# Altium PCB Rx_Universal_MFB_PCB.PcbDoc
Units mm, origin at the board's own origin, x right, y up, seen from the top; angles counter-clockwise.
Board outline 137 x 63 mm, 2 copper layers (Top Layer, Bottom Layer); 78 components, 29 nets, 176 pads, 5 vias.
Unrouted connection lines stored in the file: 50.
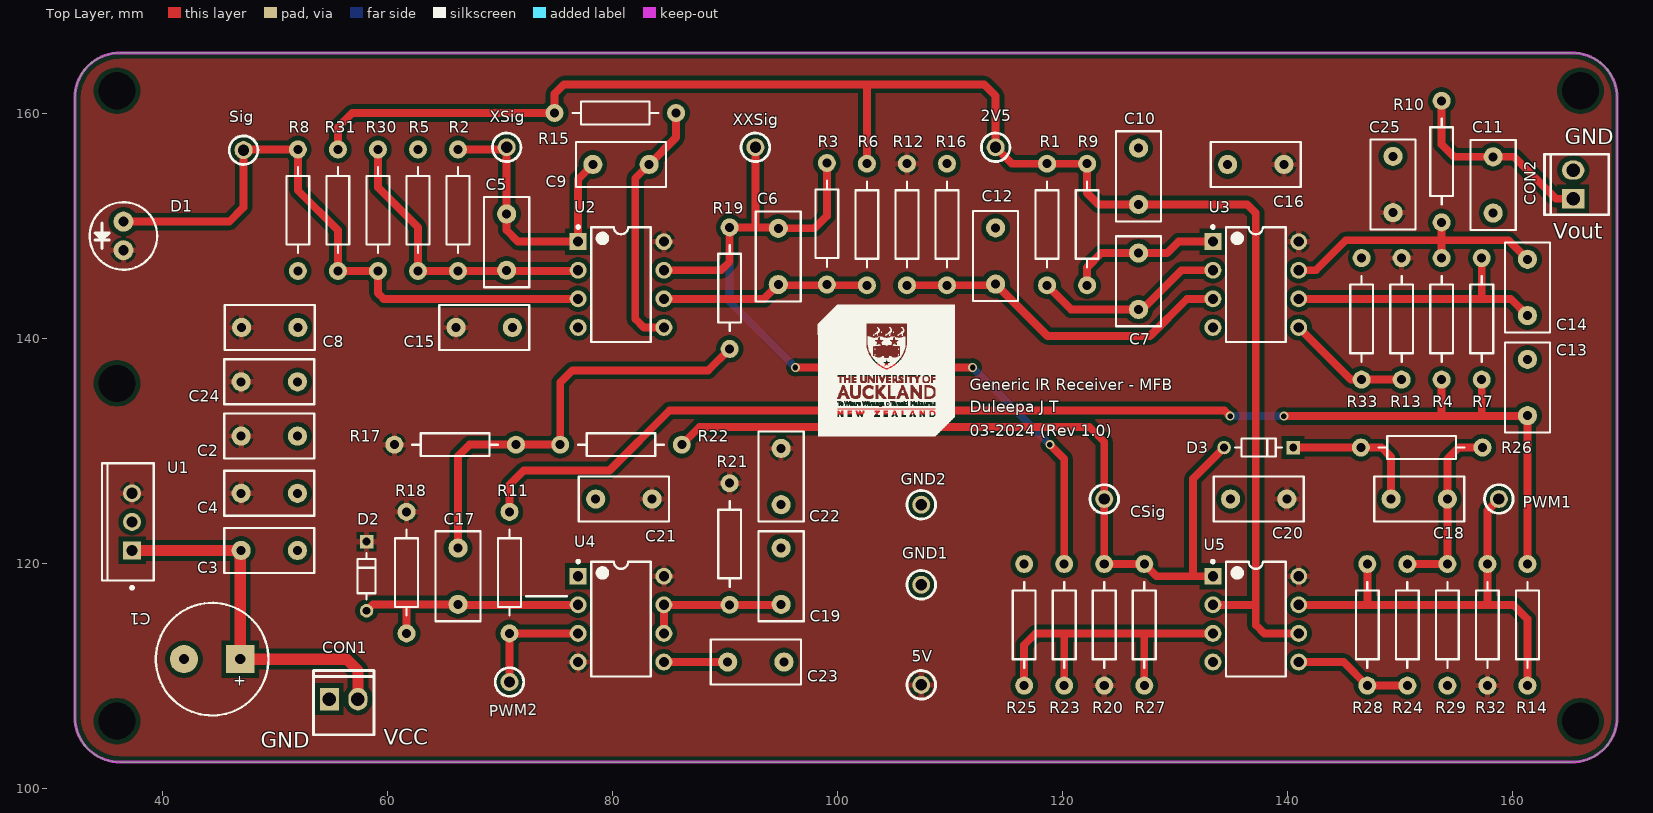
[diagram p0: Top Layer view]
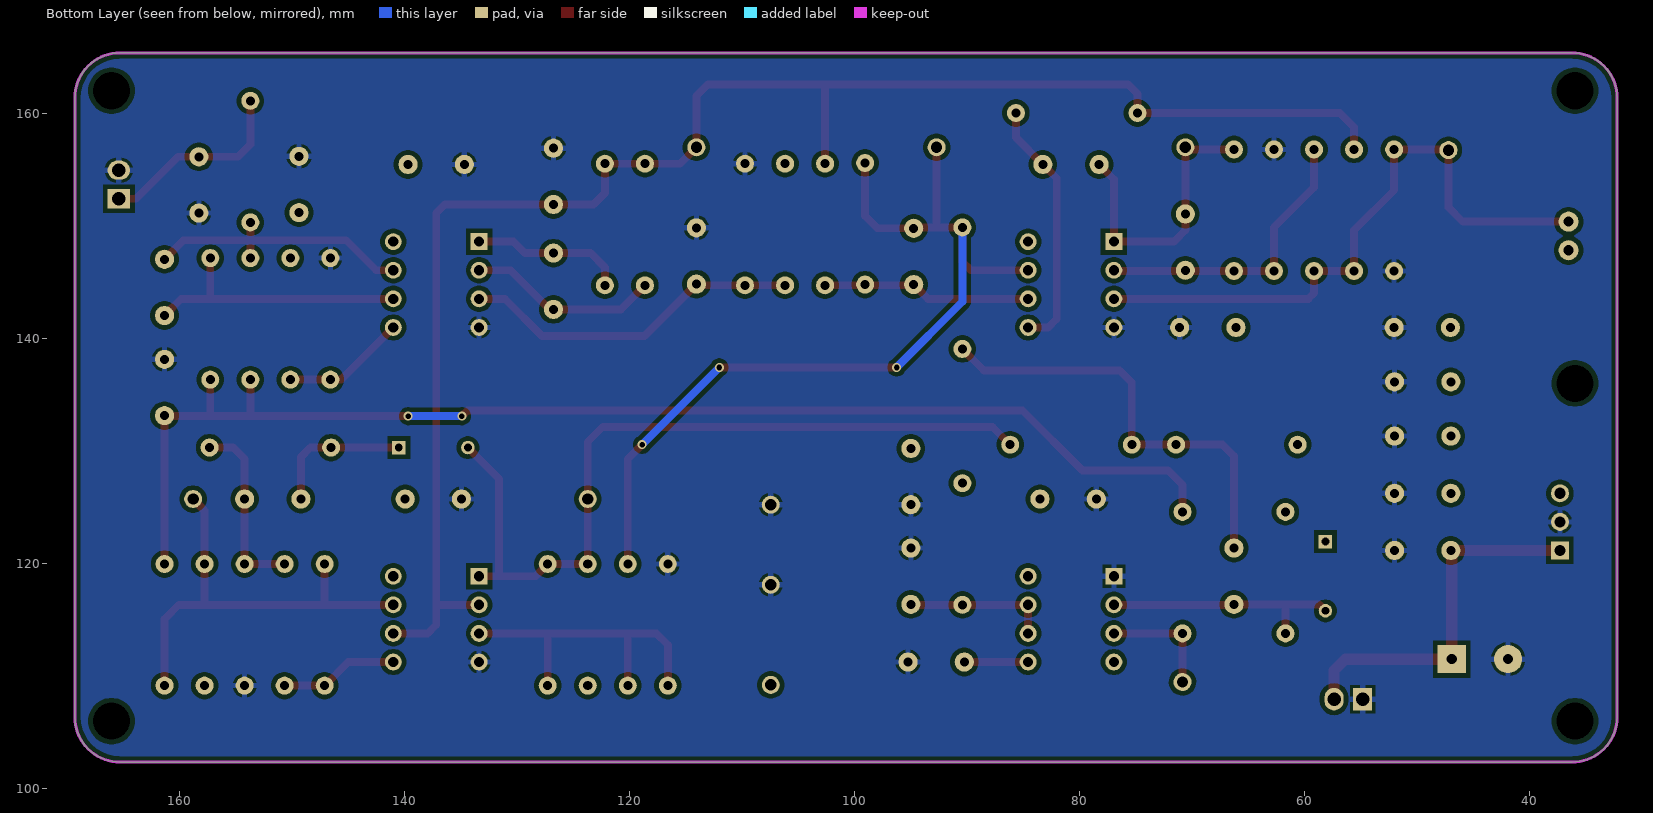
[diagram p1: Bottom Layer view, seen from below]
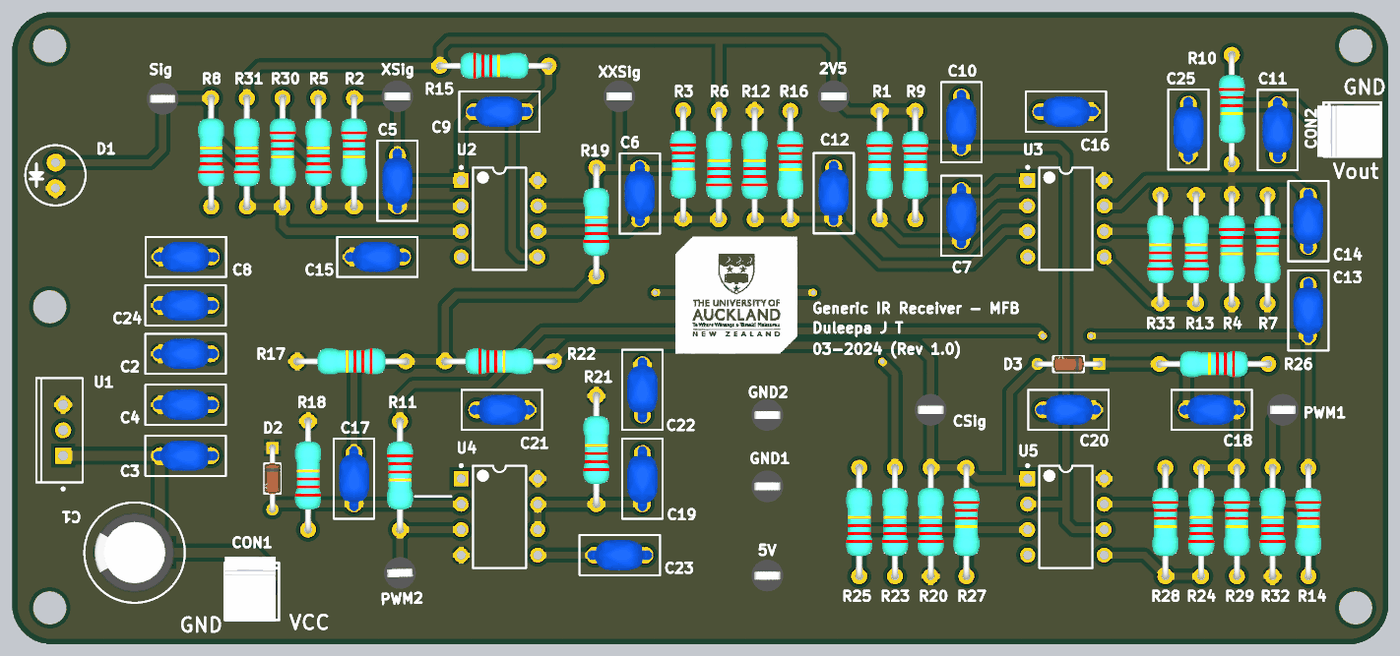
[diagram p2: 3D render of the assembled board from above, using the file's embedded part models]

## Layer stack, top to bottom
Top Solder: solder mask 0.0102, Solder Resist, Dk 3.5
Top Layer: signal copper 0.0356
Dielectric 1: dielectric 0.32, FR-4, Dk 4.8
Bottom Layer: signal copper 0.0356
Bottom Solder: solder mask 0.0102, Solder Resist, Dk 3.5

## Board outline
32.258,106.362 32.258,161.362 cw(c36.258,161.362) 36.258,165.362 165.258,165.362 cw(c165.258,161.362) 169.258,161.362 169.258,106.362 cw(c165.258,106.362) 165.258,102.362 36.258,102.362 cw(c36.258,106.362)

## Design rules (kind name [scope] priority, off if disabled: settings)
BoardOutlineClearance [All] p1: gap=0.3 ignorepadtopadclearanceinfootprint=FALSE except(0.4: Arc-SplitBarrior Arc-SplitContinuation Track-SplitBarrior Track-SplitContinuation SMDPad-SplitBarrior SMDPad-SplitContinuation THPad-SplitBarrior THPad-SplitContinuation Via-SplitBarrior Via-SplitContinuation Fill-SplitBarrior Fill-SplitContinuation Poly-SplitBarrior Poly-SplitContinuation Region-SplitBarrior Region-SplitContinuation Text-SplitBarrior Text-SplitContinuation)
Clearance [All] p1: gap=0.4 ignorepadtopadclearanceinfootprint=TRUE
Height [All] p1: minheight=0 maxheight=50 prefheight=12.7
HoleSize [All] p1: absolutevalues=TRUE maxlimit=12 minlimit=0.25 maxpercent=80.000 minpercent=20.000
MinimumAnnularRing [All] p1: minimumring=0.13
MinimumSolderMaskSliver [All] p1: minsoldermaskwidth=0.1
PolygonConnect PolygonConnect_1 [All] p1: thpad.connectstyle=Relief thpad.reliefconductorwidth=0.508 thpad.reliefentries=4 thpad.polygonreliefangle="90 Angle" thpad.airgapwidth=0.254 smdpad.connectstyle=Relief smdpad.reliefconductorwidth=0.508 smdpad.reliefentries=4 smdpad.polygonreliefangle="90 Angle" smdpad.airgapwidth=0.254 via.connectstyle=Direct via.reliefconductorwidth=0.508 via.reliefentries=4 via.polygonreliefangle="90 Angle" via.airgapwidth=0.254
RoutingCorners [All] p1: cornerstyle=Round minsetback=2.54 maxsetback=2.54
RoutingVias [All] p1: holewidth=0.4 width=0.65 viastyle="Through Hole" minholewidth=0.25 minwidth=0.4 maxholewidth=1 maxwidth=2
SilkToSilkClearance [All] p1: silktosilkclearance=0.1
SilkToSolderMaskClearance [IsPad] p1: minsilkscreentomaskgap=0.1 clearancetoexposedcopper=TRUE
SolderMaskExpansion [All] p1: expansion=0.102 istentingtop=FALSE
SupplyNets "Schematic Supply Nets" [InNet('Vof')] p1: voltage=0.000
SupplyNets "Schematic Supply Nets_20" [InNet('XXSig')] p2: voltage=0.000
SupplyNets "Schematic Supply Nets_19" [InNet('2V5')] p3: voltage=0.000
SupplyNets "Schematic Supply Nets_18" [InNet('PWM_555')] p4: voltage=0.000
SupplyNets "Schematic Supply Nets_17" [InNet('Sig')] p5: voltage=0.000
SupplyNets "Schematic Supply Nets_16" [InNet('XSig')] p6: voltage=0.000
SupplyNets "Schematic Supply Nets_15" [InNet('CSig')] p7: voltage=0.000
SupplyNets "Schematic Supply Nets_14" [InNet('PWM_Op')] p8: voltage=0.000
SupplyNets "Schematic Supply Nets_13" [InNet('Vfilt')] p9: voltage=0.000
SupplyNets "Schematic Supply Nets_9" [InNet('GND')] p10: voltage=0.000
SupplyNets "Schematic Supply Nets_8" [InNet('VCC')] p11: voltage=0.000
SupplyNets "Schematic Supply Nets_6" [InNet('5V')] p12: voltage=0.000
SupplyNets "Schematic Supply Nets_3" [InNet('CNT')] p13: voltage=0.000
SupplyNets "Schematic Supply Nets_1" [InNet('Vrc')] p14: voltage=0.000
Width [All] p1: maxlimit=10.16 minlimit=0.127 preferedwidth=0.508
24 further rules are at their usual default settings.

## Components (designator, comment, footprint, x,y, rotation, side; value= is the part's Value field where it differs from the comment)
2V5 "TP TH" TP_TH_2.5mm 114.046,156.972 r0 top
5V "TP TH" TP_TH_2.5mm 107.442,109.22 r0 top
C1 "ECAP" CR05 44.45,111.506 r180 top
C2 "CCAP_TH_5P0" CCAP_5P0 49.53,131.318 r180 top
C3 "CCAP_TH_5P0" CCAP_5P0 49.53,121.158 r180 top
C4 "CCAP_TH_5P0" CCAP_5P0 49.53,126.238 r180 top
C5 "CCAP_TH_5P0" CCAP_5P0 70.612,148.55 r270 top
C6 "CCAP_TH_5P0" CCAP_5P0 94.742,147.28 r270 top
C7 "CCAP_TH_5P0" CCAP_5P0 126.746,145.074 r270 top
C8 "CCAP_TH_5P0" CCAP_5P0 49.57,140.97 r180 top
C9 "CCAP_TH_5P0" CCAP_5P0 80.772,155.448 r180 top
C10 "CCAP_TH_5P0" CCAP_5P0 126.746,154.392 r90 top
C11 "CCAP_TH_5P0" CCAP_5P0 158.242,153.63 r90 top
C12 "CCAP_TH_5P0" CCAP_5P0 114.046,147.32 r90 top
C13 "CCAP_TH_5P0" CCAP_5P0 161.29,135.636 r270 top
C14 "CCAP_TH_5P0" CCAP_5P0 161.29,144.526 r90 top
C15 "CCAP_TH_5P0" CCAP_5P0 68.62,140.97 r180 top
C16 "CCAP_TH_5P0" CCAP_5P0 137.16,155.448 r0 top
C17 "CCAP_TH_5P0" CCAP_5P0 66.294,118.872 r90 top
C18 "CCAP_TH_5P0" CCAP_5P0 151.678,125.73 r180 top
C19 "CCAP_TH_5P0" CCAP_5P0 94.996,118.872 r270 top
C20 "CCAP_TH_5P0" CCAP_5P0 137.414,125.73 r0 top
C21 "CCAP_TH_5P0" CCAP_5P0 81.026,125.73 r0 top
C22 "CCAP_TH_5P0" CCAP_5P0 94.996,127.722 r90 top
C23 "CCAP_TH_5P0" CCAP_5P0 92.75,111.252 r180 top
C24 "CCAP_TH_5P0" CCAP_5P0 49.53,136.144 r180 top
C25 "CCAP_TH_5P0" CCAP_5P0 149.352,153.67 r270 top
CON1 "HDR2X1" HDR2X1_2P54 54.864,107.95 r90 top
CON2 "HDR2X1" HDR2X1_2P54 165.354,152.4 r180 top
CSig "TP TH" TP_TH_2.5mm 123.698,125.73 r0 top
D1 "PhotoD_TH" TH_LED 36.576,149.098 r270 top
D2 "BAT85,113" FP-SOD68-MFG 58.166,118.872 r270 top
D3 "BAT85,113" FP-SOD68-MFG 137.414,130.302 r180 top
GND1 "TP TH" TP_TH_2.5mm 107.442,118.11 r0 top
GND2 "TP TH" TP_TH_2.5mm 107.442,125.222 r0 top
PWM1 "TP TH" TP_TH_2.5mm 158.75,125.73 r0 top
PWM2 "TP TH" TP_TH_2.5mm 70.866,109.474 r2 top
R1 "RESAX4" RAX4 118.618,150.114 r270 top
R2 "RESAX4" RAX4 66.294,151.384 r270 top
R3 "RESAX4" RAX4 99.06,150.18 r270 top
R4 "RESAX4" RAX4 153.67,141.732 r270 top
R5 "RESAX4" RAX4 62.738,151.384 r90 top
R6 "RESAX4" RAX4 102.616,150.114 r90 top
R7 "RESAX4" RAX4 157.226,141.732 r270 top
R8 "RESAX4" RAX4 52.07,151.384 r90 top
R9 "RESAX4" RAX4 122.174,150.114 r270 top
R10 "RESAX4" RAX4 153.67,155.702 r270 top
R11 "RESAX4" RAX4 70.866,119.192 r270 top
R12 "RESAX4" RAX4 106.172,150.114 r90 top
R13 "RESAX4" RAX4 150.114,141.732 r90 top
R14 "RESAX4" RAX4 161.29,114.554 r270 top
R15 "RESAX4" RAX4 80.264,160.02 r0 top
R16 "RESAX4" RAX4 109.728,150.114 r270 top
R17 "RESAX4" RAX4 66.04,130.556 r180 top
R18 "RESAX4" RAX4 61.722,119.192 r90 top
R19 "RESAX4" RAX4 90.424,144.46 r90 top
R20 "RESAX4" RAX4 123.698,114.554 r90 top
R21 "RESAX4" RAX4 90.424,121.732 r90 top
R22 "RESAX4" RAX4 80.772,130.556 r0 top
R23 "RESAX4" RAX4 120.142,114.554 r90 top
R24 "RESAX4" RAX4 150.622,114.554 r90 top
R25 "RESAX4" RAX4 116.586,114.554 r90 top
R26 "RESAX4" RAX4 151.892,130.302 r180 top
R27 "RESAX4" RAX4 127.254,114.554 r270 top
R28 "RESAX4" RAX4 147.066,114.554 r270 top
R29 "RESAX4" RAX4 154.178,114.554 r270 top
R30 "RESAX4" RAX4 59.182,151.384 r270 top
R31 "RESAX4" RAX4 55.626,151.384 r90 top
R32 "RESAX4" RAX4 157.734,114.554 r90 top
R33 "RESAX4" RAX4 146.558,141.732 r90 top
Sig "TP TH" TP_TH_2.5mm 47.244,156.718 r0 top
U1 "REG78M05" TO220_Reg 37.338,123.698 r180 top
U2 "TLC082IP" P0008A 80.772,144.78 r0 top locked
U3 "TLC082IP" P0008A 137.16,144.78 r0 top locked
U4 "NE555P" P0008A 80.772,115.062 r0 top
U5 "TLC082IP" P0008A 137.16,115.062 r0 top
XSig "TP TH" TP_TH_2.5mm 70.612,156.972 r0 top
XXSig "TP TH" TP_TH_2.5mm 92.71,156.972 r0 top

## Footprints (in the part's own frame and the unit in brackets; to place one, negate y for a bottom-side part, rotate by r counter-clockwise, add the part's x,y. Pads: shape width x height; smd on the part's side, far side on the other; paste and mask are expansions set on the pad)
CCAP_5P0 [mm]
  round 1.7 hole 0.8: 1(-2.5,0) 2(2.5,0)
  silkscreen extent -4,-2 4,2, body extent -3.25,-1.5 3.25,1.5, height 6.5
CR05 [mm]
  rect 2.5x2.5 hole 0.9: 1(-2.5,0)
  round 2.5 hole 0.9: 2(2.5,0)
  silkscreen extent -5,-5 5,5, body extent -4,-3.99 4,3.99, height 11.5
FP-SOD68-MFG [mm]
  rect 1.2x1.2 hole 0.7 paste-2539.97 mask+0: 1(-3.07,0)
  round 1.2 hole 0.7 paste-2539.97 mask+0: 2(3.07,0)
  silkscreen extent -2.07,-0.8 2.07,0.8, body extent -3.77,-0.9 3.77,0.9, height 0.25
HDR2X1_2P54 [mm] "Polarised Header 2 way"
  rect 2x1.7 hole 1.2: 1(0,0)
  oval 2x1.7 hole 1.2: 2(0,-2.54)
  silkscreen extent -3.16,-3.96 2.54,1.42, body extent -3.3,-3.64 3.18,1.44, height 10.09
P0008A [mm] "DIP, 8-Leads, Body 10.15x6.6mm, Pitch 2.54mm"
  rect 1.5x1.5 hole 0.9: 1(-3.81,3.81)
  round 1.5 hole 0.9: 2(-3.81,1.27) 3(-3.81,-1.27) 4(-3.81,-3.81) 5(3.81,-3.81) 6(3.81,-1.27) 7(3.81,1.27) 8(3.81,3.81)
  silkscreen extent -3.93,-5.1 2.65,5.23, body extent -3.95,-5.07 3.95,5.07, height 5.08
RAX4 [mm]
  round 1.6 hole 0.8: 1(-5.4,0) 2(5.4,0)
  silkscreen extent -3.81,-1.02 3.81,1.02, body extent -5.7,-1.3 5.7,1.3, height 2.7
TH_LED [mil]
  round 70 hole 35.43: 1(50,0) 2(-50,0)
  silkscreen extent -118,-118 118,118, body extent -98,-98 98,98, height 413
TO220_Reg [mm] "FM, 3-Leads, Body 10.03x8.98mm, Pitch 2.54mm"
  rect 1.6x1.6 hole 1: 1(0,2.54)
  round 1.6 hole 1: 3(0,-2.54) 4(0,0)
  silkscreen extent -1.93,-5.2 2.67,5.97, body extent -1.93,-5.2 2.67,5.2, height 20.75
TP_TH_2.5mm [mm] "Keystone through hole TP"
  round 1.6 hole 1: 1(0,0)
  silkscreen extent -1.27,-1.27 1.27,1.27, body extent -1.59,-1.59 1.59,1.59, height 5.59

## Part data
2V5 5V CSig GND1 GND2 PWM1 PWM2 Sig XSig XXSig: library part CMP-046-000000-3, "Testpoint through hole / Keystone compact / 5000 - Red / 5001 - Black / 5002 - White / 5003 - Orange / 5004 - Yellow", Design Item ID="TP TH", Source="UoAPE_Connectors and Mechanical.SchLib"
C1: library part CMP-003-000000-2, Design Item ID=ECAP, Source=CommonSymbols_V1.SchLib
C2 C3 C4 C5 C6 C7 C8 C9 C10 C11 C12 C13 C14 C15 C16 C17 C18 C19 C20 C21 C22 C23 C24 C25: library part CMP-001-00023-1, "TH ceramic cap with 5mm pitch", Design Item ID=CCAP_5P0
CON1 CON2: library part CMP-004-000000-7, "Header 2X1", Design Item ID=HDR2X1, Source=CommonSymbols_V1.SchLib
D1: library part CMP-007-00003-1, "Photo diode"
D2 D3: library part CMP-00011-1, "Rectifier Diode, Schottky, 1 Phase, 1 Element, 0.2A, 30V V(RRM), Silicon, DO-34", Case Connection=Isolated, Forward Voltage=800mV, Max Operating Temperature=125°C, Max Output current=200mA, Max Power Dissipation=200mW, Max Reverse Current=2uA, Min Operating Temperature=-55°C, Non-rep Pk Forward Current-Max=600mA, Package Body Material=Glass, Package Shape=Round, Package Style="LONG FORMMeter", Peak Reflow Temperature (Cel)=260°C, Rep Pk Reverse Voltage-Max=30V, Time @ Peak Reflow Temperature-Max (s)=40s, Diode Element Material=SILICON, Diode Type=RECTIFIER, JEDEC-95 Code=DO-34, JESD-30 Code=O-LALF-W2, JESD-609 Code=e3, Moisture Sensitivity Level=1, Number of Elements=1, Pins=2, Qualification Status="Not Qualified", Reach SVHC Compliant=Yes, Reverse Recovery Time-Max=0.004us, RoHS Compliant=Yes, Surface Mount=No, Technology=SCHOTTKY, Terminal Finish=Tin, Terminal Form=Wire, Terminal Position=AXIAL
R1 R2 R3 R4 R5 R6 R7 R8 R9 R10 R11 R12 R13 R14 R15 R16 R17 R18 R19 R20 R21 R22 R23 R24 R25 R26 R27 R28 R29 R30 R31 R32 R33: library part CMP-010-000001-2, "Axial Resistor", Design Item ID=RESAX4, Source=CommonSymbols_V1.SchLib
U1: library part CMP-011-000018-2, "78M Series Linear Regulators", Design Item ID=REG78MXX, Source=CommonSymbols_V1.SchLib
U2 U3 U5: library part CMP-014-00006-1, "Operational Amplifier, 2 Func, 3000uV Offset-Max, BIMOS, PDIP8", Average Bias Current-Max (IIB)=700pA, Bias Current-Max (IIB) @25C=50pA, Case/Package=DIP, Frequency Compensation=YES, Input Offset Voltage-Max=3mV, Max Operating Temperature=125°C, Max Supply Current=7mA, Micropower=No, Min Operating Temperature=-40°C, Nominal Supply Voltage=5V, Package Body Material=Plastic, Package Equivalence Code=DIP8,.3, Package Shape=Rectangular, Package Style=IN-LINEMeter, Power=100mW, Power Supplies=+-2.25/+-8/4.5/16V, Supply Voltage Limit-Max=17V, Temperature Grade=AUTOMOTIVE, Voltage Gain-Min=100000, Amplifier Type="OPERATIONAL AMPLIFIER", Architecture=VOLTAGE-FEEDBACK, Channels=2, Common-mode Reject Ratio-Nom=110dB, Height - Seated (Max)=5.08mm, JESD-30 Code=R-PDIP-T8, JESD-609 Code=e4, Length=9.81mm, Low-Bias=Yes, Low-Offset=No, Packaging=Rail/Tube, Pins=8, Programmable Power=No, Qualification Status="Not Qualified", Reach SVHC Compliant=Yes, RoHS Compliant=Yes, Slew Rate=16V/µs, Slew Rate-Min=9.5V/µs, Surface Mount=No, Technology=BIMOS, Terminal Finish=Nickel, Terminal Form="Through Hole", Terminal Pitch=2.54mm, Terminal Position=DUAL, Unity Gain BW-Nom=10MHz, Wideband=No, Width=7.62mm
U4: library part CMP-00023-00000-1, "1 Func, BIPolar, PDIP8", Case/Package=DIP, Max Operating Temperature=70°C, Max Supply Voltage=16V, Min Operating Temperature=0°C, Min Supply Voltage=4.5V, Nominal Supply Voltage=5V, Package Body Material=Plastic, Package Equivalence Code=DIP8,.3, Package Shape=Rectangular, Package Style=IN-LINEMeter, Power Supplies=5/15V, Temperature Grade=COMMERCIAL, Channels=1, Height - Seated (Max)=5.08mm, JESD-30 Code=R-PDIP-T8, JESD-609 Code=e3, Length=9.81mm, Pins=8, Qualification Status="Not Qualified", Reach SVHC Compliant=Yes, RoHS Compliant=Yes, Surface Mount=No, Technology=BIPOLAR, Terminal Finish=Tin, Terminal Form="Through Hole", Terminal Pitch=2.54mm, Terminal Position=DUAL, Throw Configuration="PULSE; RECTANGULAR", Width=7.62mm

## Free pads (board coordinates)
  round 1.524 hole 3.3: 10(36,106) 10(36,136) 10(36,162) 10(166,106) 10(166,162)

## Via types
v1: diameter 0.8, hole 0.5, Top Layer to Bottom Layer, 5 vias

## Nets (pads, with @x,y where several pads share a name; then routed paths per layer and width w, separated by ;. In a path a pad name is that pad's centre, name@x,y a point inside that pad or via, vN(x,y) a via of type N, cw(c..) or ccw(c..) an arc to the next point about the centre after c; other vN are vias at no path point)
2V5: 2V5.1 C10.1 R1.1 R6.2 R9.1 R15.1 R31.2 U5.2 U5.6 | length 146.6
  Top Layer w0.7: R31.2 55.626,158.75 56.896,160.02 R15.1 74.864,161.732 75.692,162.56 102.616,162.56 ; R6.2 102.616,162.56 ; U5.2 137.16,116.332 ; U5.6 137.922,113.792 137.16,114.554 137.16,116.332 ; 102.616,162.56 113.03,162.56 114.046,161.544 2V5.1 115.504,155.514 R1.1 R9.1 122.174,152.908 123.19,151.892 C10.1 136.398,151.892 137.16,151.13 137.16,116.332
5V: 5V.1 C2.2 C4.2 C8.2 C15.2 C16.2 C20.2 C21.2 C22.2 C24.2 C25.2 D1.1 D2.1 R12.2 R13.2 R17.2 R18.2 R20.1 R21.2 R32.1 U1.3 U2.8 U3.8 U4.4 U4.8 U5.8
CNT: C23.2 U4.5 | length 5.7
  Top Layer w0.7: U4.5 C23.2
CSig: CSig.1 D3.2 R20.2 R22.2 R27.1 U5.1 | length 72.3
  Top Layer w0.7: R22.2 87.758,132.142 122.366,132.142 123.698,130.81 CSig.1 R20.2 R27.1 128.336,118.872 131.572,118.872 ; U5.1 131.572,118.872 ; D3.2 134.09,130.048 131.572,127.53 131.572,118.872
GND: C1.2 C2.1 C3.1 C4.1 C8.1 C10.2 C11.1 C12.2 C13.1 C15.1 C16.1 C19.1 C20.1 C21.1 C22.1 C23.1 C24.1 C25.1 CON1.1 CON2.2 GND1.1 GND2.1 R5.2 R8.1 R16.1 R25.2 R29.2 R33.2 U1.4 U2.4 U3.4 U4.1 U5.4
NetC5_2: C5.2 R2.2 R5.1 R30.1 U2.2 | length 26.5
  Top Layer w0.7: R30.1 59.182,153.416 62.738,149.86 R5.1 76.896,145.984 U2.2
NetC6_2: C6.2 R3.2 R6.1 U2.6 | length 18.6
  Top Layer w0.7: U2.6 93.472,143.51 C6.2 94.808,144.714 R6.1
NetC7_1: C7.1 R9.2 U3.1 | length 13.7
  Top Layer w0.7: R9.2 122.174,146.304 123.444,147.574 C7.1 129.286,147.574 130.302,148.59 U3.1
NetC7_2: C7.2 R1.2 U3.2 | length 17.1
  Top Layer w0.7: R1.2 120.758,142.574 C7.2 127.08,142.574 130.556,146.05 U3.2
NetC9_1: C9.1 R15.2 U2.5 | length 22.6
  Top Layer w0.7: U2.5 82.804,140.97 82.042,141.732 82.042,154.218 C9.1 85.664,157.84 R15.2
NetC12_1: C12.1 R12.1 R16.2 U3.3 | length 30.5
  Top Layer w0.7: R12.1 R16.2 113.94,144.714 C12.1 118.658,140.208 127.762,140.208 131.064,143.51 U3.3
NetC13_2: C13.2 R4.2 R7.2 R11.1 R14.1 | length 115.8
  Top Layer w0.7: R11.1 70.866,127 72.136,128.27 79.756,128.27 85.09,133.604 134.366,133.604 v1(134.874,133.096) ; v1(139.645,133.096) 153.67,133.096 ; R4.2 153.67,133.096 ; R7.2 157.226,133.096 ; R14.1 161.29,132.882 C13.2@161.544,133.136 ; C13.2@161.544,133.096 157.226,133.096 ; 153.67,133.096 157.226,133.096
  Bottom Layer w0.7: v1(134.874,133.096) v1(139.645,133.096)
NetC14_1: C14.1 R7.1 U3.6 | length 24.6
  Top Layer w0.7: U3.6 157.226,143.51 ; R7.1 157.226,143.51 ; C14.1 159.806,143.51 157.226,143.51
NetC17_1: C17.1 D2.2 R18.1 U4.2 | length 21.6
  Top Layer w0.7: D2.2 58.736,116.372 61.722,116.372 ; R18.1 61.722,116.372 ; U4.2 66.334,116.332 C17.1 61.722,116.372
NetC17_2: C17.2 R17.1 R19.1 R22.1 | length 39.5
  Top Layer w0.7: C17.2 66.294,129.54 67.31,130.556 R17.1 R22.1 75.372,136.078 76.454,137.16 88.524,137.16 R19.1
NetC18_1: C18.1 R24.2 R26.1 R29.1 | length 16.4
  Top Layer w0.7: R24.2 R29.1 C18.1 154.178,129.286 155.194,130.302 R26.1
NetC18_2: C18.2 D3.1 R26.2 | length 12.8
  Top Layer w0.7: D3.1 R26.2 148.336,130.302 149.178,129.46 C18.2
NetR13_1: R13.1 R33.1 U3.5 | length 11.1
  Top Layer w0.7: U3.5 145.608,136.332 R13.1
NetR23_1: R23.1 R25.1 R27.2 U5.3 | length 30.2
  Top Layer w0.7: R25.1 116.586,112.776 117.602,113.792 119.888,113.792 ; R23.1 120.142,113.538 119.888,113.792 ; R27.2 127.254,113.792 ; U5.3 127.254,113.792 ; 119.888,113.792 127.254,113.792
NetR24_1: R24.1 R28.2 U5.5 | length 10.5
  Top Layer w0.7: U5.5 144.968,111.252 R28.2 R24.1
PWM_555: PWM2.1 R11.2 U4.3 | length 10.4
  Top Layer w0.7: PWM2.1 R11.2 U4.3
PWM_Op: PWM1.1 R14.2 R28.1 R32.2 U5.7 | length 40.2
  Top Layer w0.7: U5.7 147.066,116.332 ; R28.1 147.066,116.332 ; PWM1.1 157.734,124.714 R32.2 157.734,116.332 ; R14.2 161.29,115.062 160.02,116.332 157.734,116.332 ; 147.066,116.332 157.734,116.332
Sig: D1.2 R8.2 R30.2 R31.1 Sig.1 U2.3 | length 56.9
  Top Layer w0.7: D1.2 45.974,150.368 47.244,151.638 Sig.1 47.31,156.784 R8.2 52.07,153.162 55.626,149.606 R31.1 R30.2 59.182,144.018 59.69,143.51 U2.3
VCC: C1.1 C3.2 CON1.2 U1.1 | length 32.8
  Top Layer w1: U1.1 C3.2 46.95,121.078 C1.1 56.388,111.506 57.404,110.49 CON1.2
Vfilt: C11.2 CON2.1 R10.1 | length 17.6
  Top Layer w0.7: R10.1 153.67,157.226 154.766,156.13 C11.2 160.1,156.13 163.83,152.4 CON2.1
Vof: C14.2 R4.1 R10.2 U3.7 | length 25.3
  Top Layer w0.7: U3.7 142.494,146.05 145.161,148.717 153.67,148.717 ; R4.1 153.67,148.717 ; R10.2 153.67,148.717 ; C14.2 159.599,148.717 153.67,148.717
Vrc: C19.2 R21.1 U4.6 U4.7 | length 13
  Top Layer w0.7: U4.6 U4.7 R21.1 94.956,116.332 C19.2
XSig: C5.1 C9.2 R2.1 U2.1 XSig.1 | length 25.9
  Top Layer w0.7: R2.1 70.424,156.784 XSig.1 C5.1 70.612,149.606 71.628,148.59 U2.1 76.962,154.138 C9.2
XXSig: C6.1 R3.1 R19.2 R23.2 U2.7 XXSig.1 | length 81.7
  Top Layer w0.7: U2.7 89.662,146.05 90.424,146.812 R19.2 92.543,149.86 ; XXSig.1 92.71,150.027 92.543,149.86 ; v1(96.266,137.414) v1(112.014,137.414) ; R3.1 99.06,150.876 97.964,149.78 C6.1 94.662,149.86 92.543,149.86 ; v1(118.872,130.556) 120.142,129.286 R23.2
  Bottom Layer w0.7: R19.2 90.424,143.256 v1(96.266,137.414) ; v1(112.014,137.414) v1(118.872,130.556)

## Polygon pours and split planes (outlines as drawn)
GND on Bottom Layer "GND_L02_P000" (solid, pour order 0): 32.258,165.362 169.258,165.362 169.258,102.362 32.258,102.362
5V on Top Layer "5V_L01_P001" (solid, pour order 1): 32.258,165.362 169.258,165.362 169.258,102.362 32.258,102.362

## Keep-outs
Keep-Out Layer:
  the board outline again, w0.254

## Silkscreen, mask and mechanical layers (free items; w line width, h text height)
Top Overlay:
  drawing of 25 lines, arcs and shapes, not listed
  text "GND" at 164.592,157.226 h1.4
  text "Vout" at 163.576,148.844 h1.4
  text "Generic IR Receiver - MFB" at 111.76,135.382 h1
  text "Duleepa J T" at 111.76,133.429 h1
  text "03-2024 (Rev 1.0)" at 111.76,131.318 h1
  text "VCC" at 59.69,103.886 h1.4
  text "GND" at 48.768,103.632 h1.4
Mechanical 1:
  the board outline again, w0.254

## Text inside footprints (layer, text, board x,y; h text height)
C1: Top Overlay "+" at 47.498,109.982 h1 r180